# EAGLE board Motherboard (EAGLE 9.6.2)
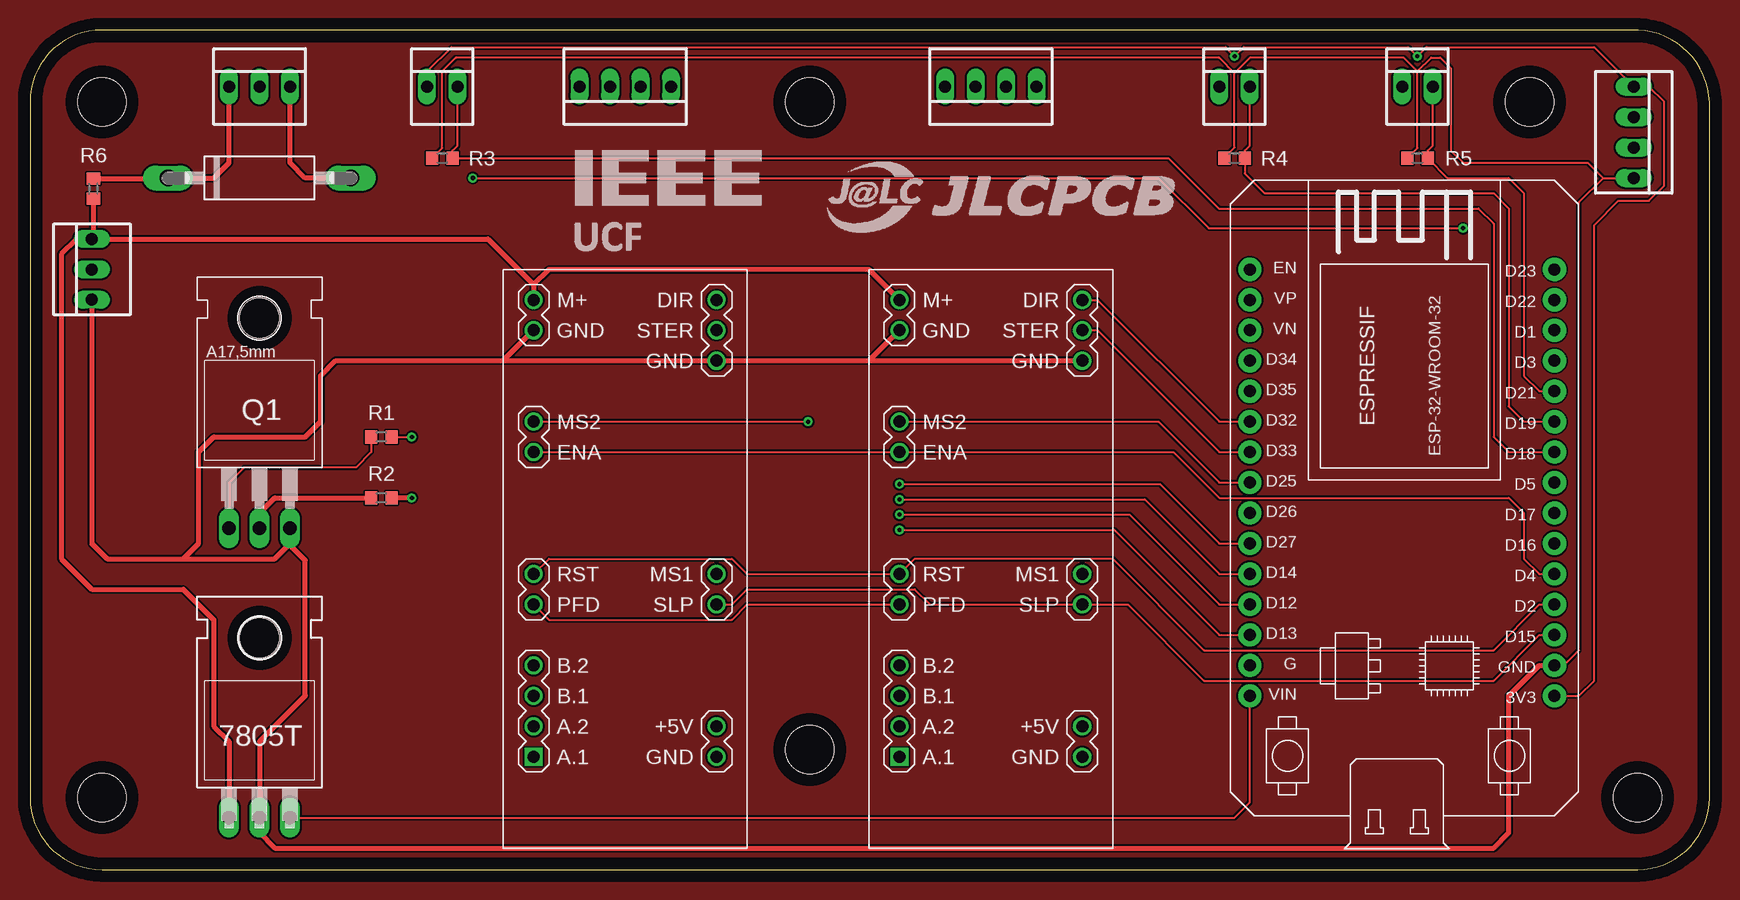
[diagram p0: board, top side]
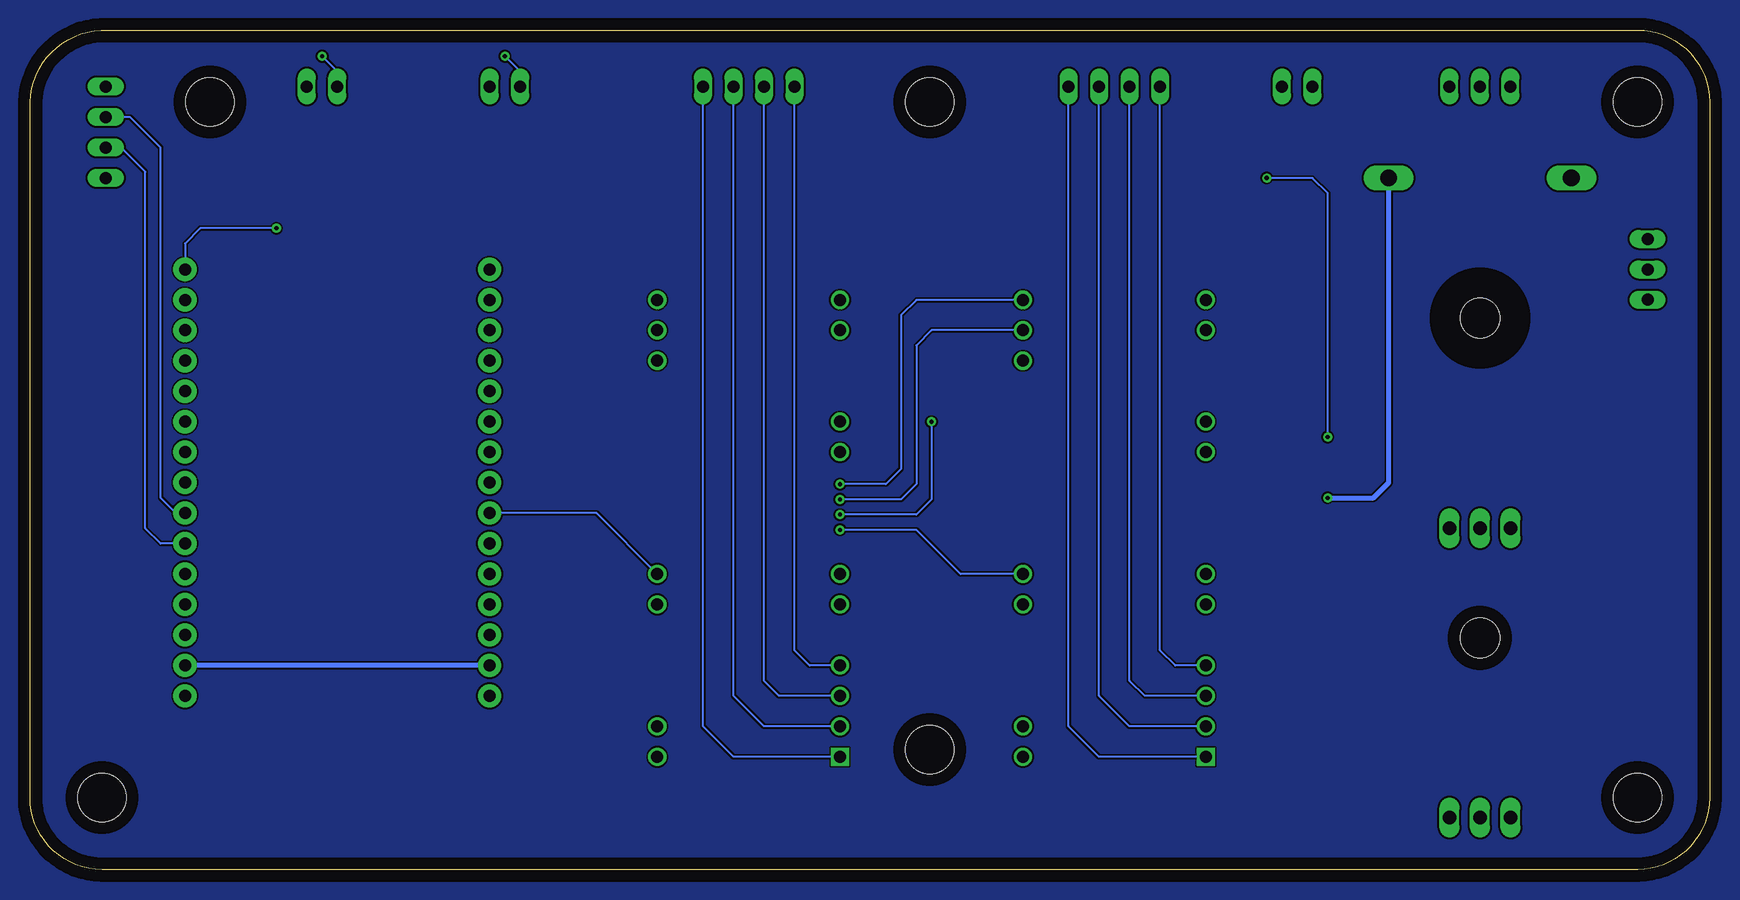
[diagram p1: board, bottom side, seen from below]

Size 140 x 70 mm. Coordinates in mm from the lower left corner, seen from the top.
Outline: 6,0 134,0 arc90 140,6 140,64 arc90 133.49,70 6,70 arc90 0,64 0,6 arc90 6,0
Copper layers (1*16): Top 0.035mm / dielectric 1.5mm / Bottom 0.035mm
Design rules "default": minimum track width 6mil, minimum drill 0.35mm, track to track 6mil, track to pad 6mil, pad to pad 6mil, via to via 6mil, smd to smd 6mil, copper to edge 40mil, drill to drill 6mil, minimum pad ring 10mil, minimum via ring 8mil, stop-mask expansion 4mil, vias tented up to drill 0mil, thermal gap 10mil
Holes 4 mm at 6,64 6,6 134,6 125,64 65,64 65,10

## Footprints (pad centres in the part's own frame; a part is rotated, then mirrored left to right if it is on the bottom)
ESP32-DEVKITV1 = drill 1 pad 1.93: 3V3 0,0; D1 30.48,0; D2 7.62,0; D3 27.94,0; D4 10.16,0; D5 17.78,0; D12 7.62,25.4; D13 5.08,25.4; D14 10.16,25.4; D15 5.08,0; D16 12.7,0; D17 15.24,0; D18 20.32,0; D19 22.86,0; D21 25.4,0; D22 33.02,0; D23 35.56,0; D25 17.78,25.4; D26 15.24,25.4; D27 12.7,25.4; D32 22.86,25.4; D33 20.32,25.4; D34 27.94,25.4; D35 25.4,25.4; EN 35.56,25.4; GND 2.54,25.4; GND@1 2.54,0; VIN 0,25.4; VN 30.48,25.4; VP 33.02,25.4
CB417-15 = drill 1.397 long: A 7.62,0; C -7.62,0
TO220H = drill 1.118 long: 1 -2.54,-10.16; 2 0,-10.16; 3 2.54,-10.16 | hole 3.302: 0,4.826
TO220 = drill 1.118 long: 1 -2.54,-6.35; 2 0,-6.35; 3 2.54,-6.35 | hole 3.302: 0,11.176
R0603 = smd 1 x 1.1: 1 -0.85,0; 2 0.85,0
STEPPER-MOTOR-EASY-DRIVER = drill 1: JP1.1 19.05,7.62; JP1.2 21.59,7.62; JP2.1 16.51,-7.62; JP2.2 19.05,-7.62; JP2.3 21.59,-7.62; JP3.2 -13.97,7.62; JP3.3 -11.43,7.62; JP3.4 -8.89,7.62; JP4.1 -13.97,-7.62; JP4.2 -16.51,-7.62; JP5.1 -1.27,-7.62; JP5.2 -3.81,-7.62; JP6.1 8.89,7.62; JP6.2 11.43,7.62; JP7.1 -3.81,7.62; JP7.2 -1.27,7.62 | drill 1 square: JP3.1 -16.51,7.62
22-23-2021 = drill 1 long: 1 -1.27,0; 2 1.27,0
22-23-2031 = drill 1 long: 1 -2.54,0; 2 0,0; 3 2.54,0
22-23-2041 = drill 1 long: 1 -3.81,0; 2 -1.27,0; 3 1.27,0; 4 3.81,0

## Placement (x,y rotation side)
BOARD1  ESP32DEVKITV1  [ESP32-DEVKITV1]  127.08,14.48 90 top
D1  [CB417-15]  19.13,57.66 0 top
IC1  7805T  [TO220H]  19.13,14.48 0 top
Q1  BUZ10  [TO220]  19.13,34.8 0 top
R1  [R0603]  29.29,36.07 180 top
R2  [R0603]  29.29,30.99 0 top
R3  [R0603]  34.37,59.31 180 top
R4  [R0603]  100.41,59.31 180 top
R5  [R0603]  115.65,59.31 180 top
R6  [R0603]  5.29,56.77 270 top
U$1  STEPPER-MOTOR-EASY-DRIVER  [STEPPER-MOTOR-EASY-DRIVER]  49.61,25.91 90 top
U$2  STEPPER-MOTOR-EASY-DRIVER  [STEPPER-MOTOR-EASY-DRIVER]  80.09,25.91 90 top
X1  22-23-2021  [22-23-2021]  115.65,65.28 0 top
X2  22-23-2031  [22-23-2031]  19.13,65.28 0 top
X3  22-23-2031  [22-23-2031]  5.16,50.04 90 top
X4  22-23-2041  [22-23-2041]  133.68,61.47 270 top
X5  22-23-2041  [22-23-2041]  80.09,65.28 180 top
X6  22-23-2041  [22-23-2041]  49.61,65.28 180 top
X7  22-23-2021  [22-23-2021]  34.37,65.28 0 top
X8  22-23-2021  [22-23-2021]  100.41,65.28 0 top

## Library data of the parts
BOARD1 = ESP32-DEVKITV1
D1 = adafruit
IC1 = linear
Q1 = transistor-fet
R1-R6 = rcl; SPICEPREFIX: R
U$1 U$2 = Ultrasonic Sensor
X1 X7 X8 = con-molex; MF: MOLEX; MPN: 22-23-2021; OC_FARNELL: 1462926; OC_NEWARK: 25C3832
X2 X3 = con-molex; MF: MOLEX; MPN: 22-23-2031; OC_FARNELL: 1462950; OC_NEWARK: 30C0862
X4-X6 = con-molex; MF: MOLEX; MPN: 22-23-2041; OC_FARNELL: 1462920; OC_NEWARK: 38C0355

## Nets
3.3V: BOARD1.3V3 X1.1 X4.1 X7.1 X8.1
+5V: BOARD1.VIN IC1.3
+12V: IC1.1 R6.2 U$1.JP1.2 U$2.JP1.2 X3.3
AGND: BOARD1.GND BOARD1.GND@1 IC1.2 Q1.3 R3.2 R4.2 R5.2 U$1.JP1.1 U$1.JP2.1 U$2.JP1.1 U$2.JP2.1 X3.1 X4.4
DRAIN: D1.A R2.2 X2.3
ENA: BOARD1.D4 U$1.JP6.1 U$2.JP6.1
MAGNET: BOARD1.D23 R1.1
N$1: U$1.JP3.1 X6.1
N$2: U$1.JP3.2 X6.2
N$3: U$1.JP3.3 X6.3
N$4: U$1.JP3.4 X6.4
N$5: U$2.JP3.1 X5.1
N$6: U$2.JP3.2 X5.2
N$7: U$2.JP3.3 X5.3
N$8: U$2.JP3.4 X5.4
N$9: Q1.2 R2.1
N$10: Q1.1 R1.2
N$12: D1.C R6.1 X2.1
PFD: U$1.JP7.1 U$2.JP7.1
RST: BOARD1.D2 U$1.JP7.2 U$2.JP7.2
RX: BOARD1.D16 X4.3
SLP: BOARD1.D15 U$1.JP5.2 U$2.JP5.2
TIMER_BUTTON: BOARD1.D21 R5.1 X1.2
TX: BOARD1.D17 X4.2
X_DIR: BOARD1.D27 U$1.JP2.3
X_ENDSTOP: BOARD1.D18 R3.1 X7.2
X_MS1: BOARD1.D13 U$1.JP5.1
X_MS2: BOARD1.D12 U$1.JP6.2
X_STEP: BOARD1.D14 U$1.JP2.2
Y_DIR: BOARD1.D32 U$2.JP2.3
Y_ENDSTOP: BOARD1.D19 R4.1 X8.2
Y_MS1: BOARD1.D26 U$2.JP5.1
Y_MS2: BOARD1.D25 U$2.JP6.2
Y_STEP: BOARD1.D33 U$2.JP2.2

## Tracks (layer width: path | path; a pad name or v marks a point on that pad's centre or on a via)
3.3V  (via drill 0.35)
  Top 0.152: BOARD1.3V3 129.11,14.48 130.38,15.75 130.38,53.72 132.41,55.75 134.95,55.75 136.22,57.03 136.22,64.01 134.95,65.28 X4.1 130.38,68.58 116.41,68.58 v115.65,67.82 114.89,68.58 101.17,68.58 v100.41,67.82 99.65,68.58 35.13,68.58 33.1,66.55 X7.1
  Bottom 0.152: v100.41,67.82 99.14,66.55 X8.1 | v115.65,67.82 114.38,66.55 X1.1
+5V
  Top 0.152: IC1.3 100.41,4.32 101.68,5.59 BOARD1.VIN
+12V
  Top 0.406: U$2.JP1.2 69.93,50.04 43.26,50.04 41.99,48.77 | X3.3 3.89,52.58 2.62,51.31 2.62,25.91 5.16,23.37 12.78,23.37 15.32,20.83 15.32,11.94 16.59,10.67 IC1.1 | 41.99,48.77 U$1.JP1.2 | 41.99,48.77 38.18,52.58 X3.3 | R6.2 5.29,52.71 X3.3
AGND
  Top 0.152: BOARD1.GND@1 127.84,17.02 129.11,18.29 129.11,55.63 131.14,57.66 | R3.2 34.37,60.16 34.37,66.55 35.49,67.67 99.14,67.67 100.41,66.4 | 115.65,66.55 114.53,67.67 101.68,67.67 100.41,66.4 | R5.2 115.65,60.16 115.65,66.55 | R4.2 99.56,59.35 100.41,60.2 100.41,66.4 | 115.65,66.55 116.79,67.69 117.56,67.69 118.44,66.8 118.44,59.95 119.46,58.93 129.87,58.93 131.14,57.66 | 131.14,57.66 X4.4
  Top 0.406: X3.1 5.16,27.18 6.43,25.91 12.78,25.91 | 21.61,27.12 21.67,27.18 Q1.3 | 21.61,27.12 20.4,25.91 12.78,25.91 | 21.61,27.12 22.94,25.78 22.94,14.48 19.13,10.67 IC1.2 19.13,3.05 20.4,1.78 122,1.78 123.27,3.05 123.27,14.48 125.81,17.02 BOARD1.GND@1 | 12.78,25.91 14.05,27.18 14.05,34.8 15.32,36.07 22.94,36.07 24.21,37.34 24.21,41.15 25.48,42.42 39.45,42.42 | 69.93,42.42 U$1.JP2.1 39.45,42.42 | 69.93,42.42 U$2.JP2.1 | U$2.JP1.1 69.93,42.42 | U$1.JP1.1 39.45,42.42
  Bottom 0.406: BOARD1.GND BOARD1.GND@1
DRAIN  (via drill 0.35)
  Top 0.406: D1.A 22.94,57.66 21.67,58.93 X2.3 | v31.83,30.99 R2.2
  Bottom 0.406: v31.83,30.99 28.02,30.99 26.75,32.26 D1.A
ENA
  Top 0.152: U$1.JP6.1 U$2.JP6.1 95.33,34.8 99.14,30.99 123.27,30.99 124.54,29.72 124.54,25.91 125.81,24.64 BOARD1.D4
GND
  pour Top: -6.27,70.36 -6.27,-8.38 149.94,-8.38 149.94,76.71 -3.73,76.71 -6.27,76.71
  pour Bottom: -2.46,72.9 -2.46,-4.57 16.59,-4.57 146.13,-4.57 146.13,22.1 146.13,72.9 128.35,72.9
MAGNET  (via drill 0.35)
  Top 0.152: R1.1 v31.83,36.07 | v36.91,57.66 94.06,57.66 98.25,53.47 v119.46,53.47
  Bottom 0.152: v31.83,36.07 31.83,56.39 33.1,57.66 v36.91,57.66 | v119.46,53.47 125.81,53.47 127.08,52.2 BOARD1.D23
N$1
  Bottom 0.152: U$1.JP3.1 50.88,9.4 53.42,11.94 X6.1
N$2
  Bottom 0.152: U$1.JP3.2 48.34,11.94 50.88,14.48 X6.2
N$3
  Bottom 0.152: U$1.JP3.3 47.07,14.48 48.34,15.75 X6.3
N$4
  Bottom 0.152: U$1.JP3.4 44.53,17.02 45.8,18.29 X6.4
N$5
  Bottom 0.152: U$2.JP3.1 81.36,9.4 83.9,11.94 X5.1
N$6
  Bottom 0.152: U$2.JP3.2 78.82,11.94 81.36,14.48 X5.2
N$7
  Bottom 0.152: U$2.JP3.3 77.55,14.48 78.82,15.75 X5.3
N$8
  Bottom 0.152: U$2.JP3.4 75.01,17.02 76.28,18.29 X5.4
N$9
  Top 0.406: Q1.2 19.13,29.72 20.4,30.99 R2.1
N$10
  Top 0.152: R1.2 28.44,34.8 27.17,33.53 17.86,33.53 16.59,32.26 Q1.1
N$12
  Top 0.406: R6.1 11.47,57.62 D1.C 15.32,57.66 16.59,58.93 X2.1
PFD
  Top 0.152: U$1.JP7.1 43.26,20.83 58.5,20.83 59.77,22.1 U$2.JP7.1
RST
  Top 0.152: U$1.JP7.2 43.26,25.91 58.5,25.91 59.77,24.64 U$2.JP7.2 73.74,25.91 90.25,25.91 97.87,18.29 122,18.29 125.81,22.1 BOARD1.D2
RX
  Bottom 0.152: BOARD1.D16 129.11,27.18 130.38,28.45 130.38,58.17 132.41,60.2 X4.3
SLP
  Top 0.152: U$1.JP5.2 58.5,22.1 59.77,23.37 73.74,23.37 75.01,22.1 U$2.JP5.2 91.52,22.1 97.87,15.75 122,15.75 125.81,19.56 BOARD1.D15
TIMER_BUTTON
  Top 0.152: X1.2 116.92,60.37 116.5,59.95 R5.1 118.15,57.66 123.27,57.66 124.54,56.39 124.54,41.15 125.81,39.88 BOARD1.D21
TX
  Bottom 0.152: BOARD1.D17 127.84,29.72 129.11,30.99 129.11,60.2 131.65,62.74 X4.2
X_DIR  (via drill 0.35)
  Top 0.152: v72.47,32.13 94.19,32.13 99.14,27.18 BOARD1.D27
  Bottom 0.152: U$1.JP2.3 66.12,47.5 67.39,46.23 67.39,33.4 68.66,32.13 v72.47,32.13
X_ENDSTOP
  Top 0.152: X7.2 35.64,60.37 35.22,59.95 R3.1 94.91,59.31 99.1,55.12 120.73,55.12 122,53.85 122,36.07 123.27,34.8 BOARD1.D18
X_MS1  (via drill 0.35)
  Top 0.152: v72.47,28.32 90.38,28.32 99.14,19.56 BOARD1.D13
  Bottom 0.152: U$1.JP5.1 62.44,24.64 66.12,28.32 v72.47,28.32
X_MS2  (via drill 0.35)
  Top 0.152: U$1.JP6.2 v64.85,37.34 | v72.47,29.59 91.65,29.59 99.14,22.1 BOARD1.D12
  Bottom 0.152: v64.85,37.34 64.85,30.86 66.12,29.59 v72.47,29.59
X_STEP  (via drill 0.35)
  Top 0.152: v72.47,30.86 92.92,30.86 99.14,24.64 BOARD1.D14
  Bottom 0.152: U$1.JP2.2 64.85,44.96 66.12,43.69 66.12,32.13 67.39,30.86 v72.47,30.86
Y_DIR
  Top 0.152: U$2.JP2.3 88.98,47.5 99.14,37.34 BOARD1.D32
Y_ENDSTOP
  Top 0.152: X8.2 101.68,60.37 101.26,59.95 R4.1 101.26,58.04 102.91,56.39 122,56.39 123.27,55.12 123.27,38.61 124.54,37.34 BOARD1.D19
Y_MS1
  Bottom 0.152: U$2.JP5.1 92.79,29.72 BOARD1.D26
Y_MS2
  Top 0.152: U$2.JP6.2 94.06,37.34 99.14,32.26 BOARD1.D25
Y_STEP
  Top 0.152: U$2.JP2.2 88.98,44.96 99.14,34.8 BOARD1.D33